# Altium PCB PCB1.PcbDoc
Units mm, origin at the board's own origin, x right, y up, seen from the top; angles counter-clockwise.
Board outline 54.36 x 32.89 mm, 2 copper layers (Top Layer, Bottom Layer); 7 components, 6 nets, 16 pads, 0 vias.
Unrouted connection lines stored in the file: 2.
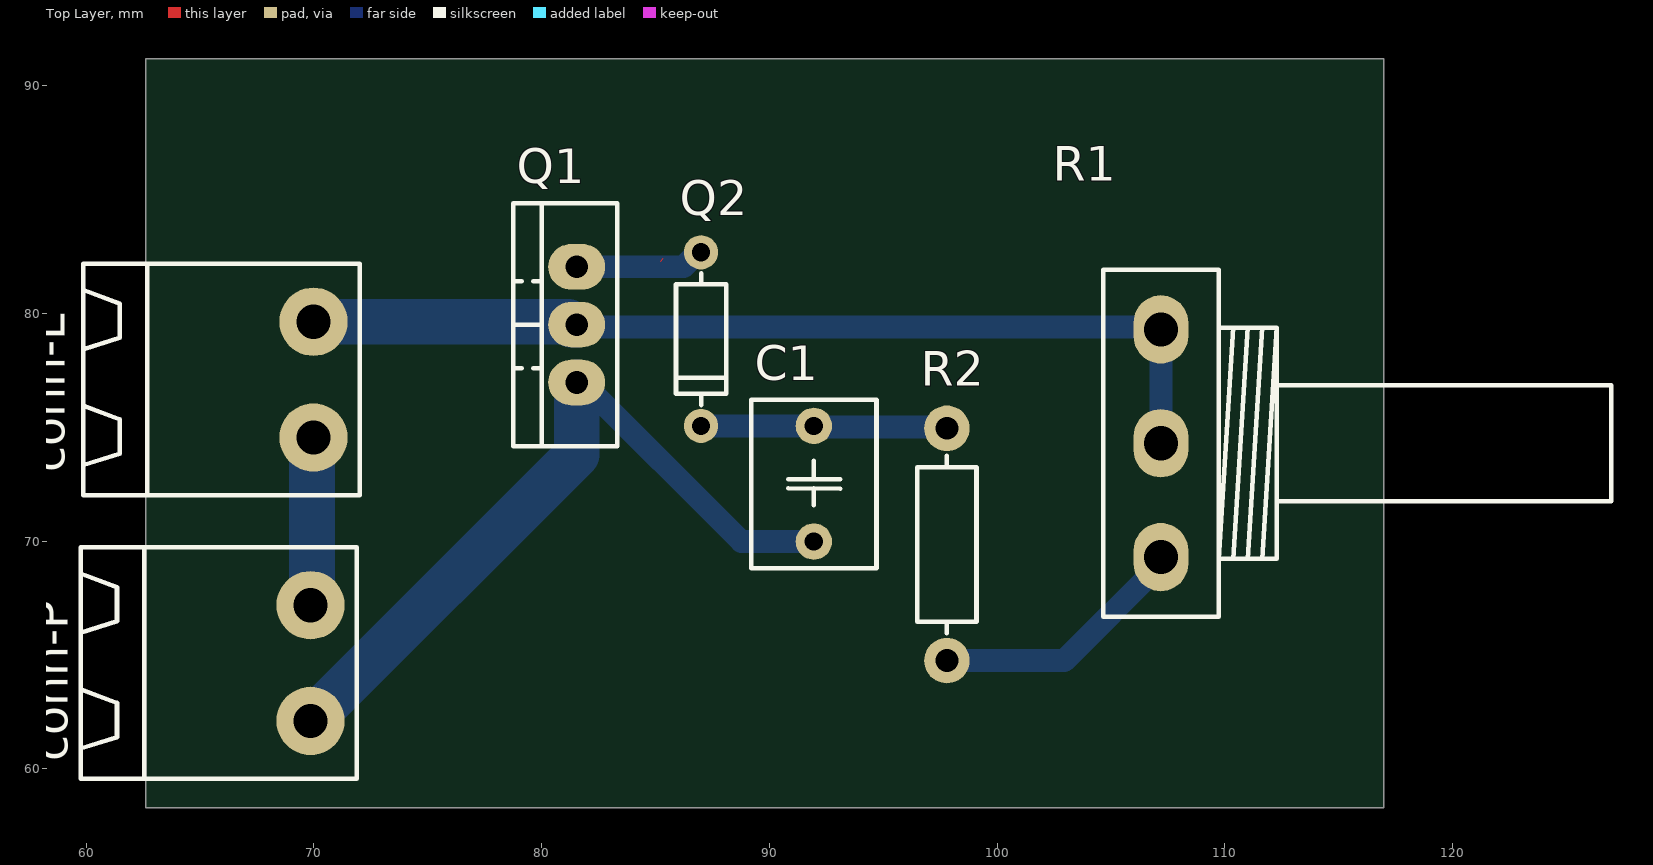
[diagram p0: Top Layer view]
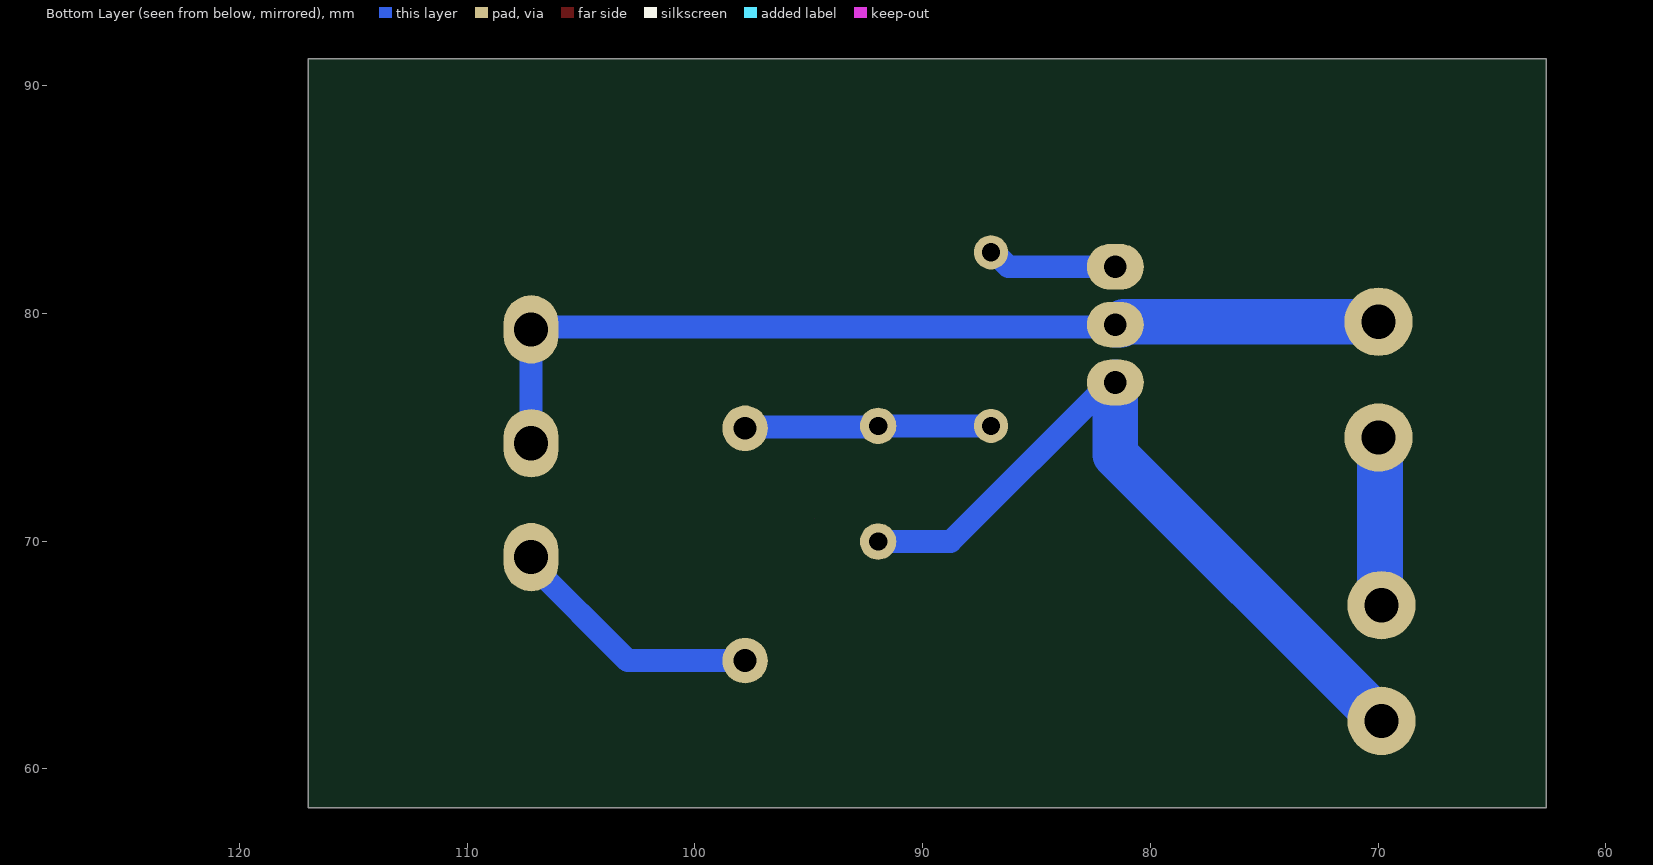
[diagram p1: Bottom Layer view, seen from below]
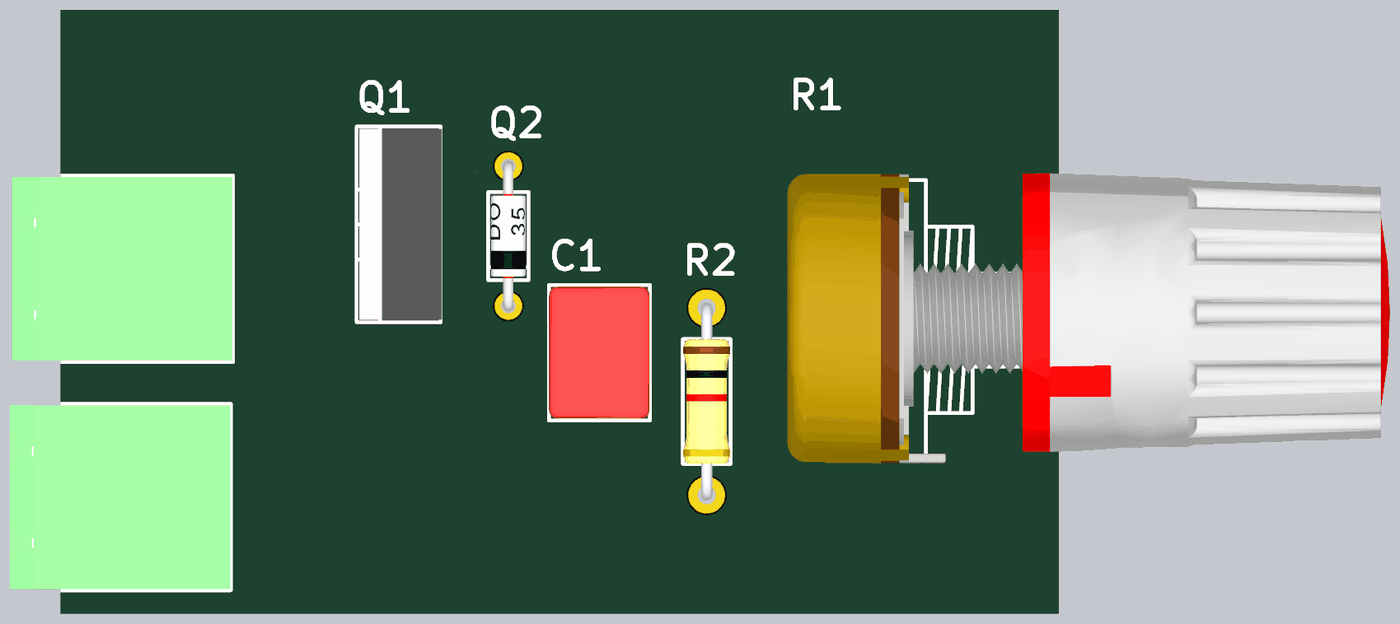
[diagram p2: 3D render of the assembled board from above, using the file's embedded part models]

## Layer stack, top to bottom
Top Solder: solder mask 0.0102, Solder Resist, Dk 3.5
Top Layer: signal copper 0.0356
Dielectric 1: dielectric 0.32, FR-4, Dk 4.8
Bottom Layer: signal copper 0.0356
Bottom Solder: solder mask 0.0102, Solder Resist, Dk 3.5

## Board outline
62.611,58.293 116.967,58.293 116.967,91.186 62.611,91.186

## Design rules (kind name [scope] priority, off if disabled: settings)
Clearance [All] p1: gap=0.254 ignorepadtopadclearanceinfootprint=FALSE
PolygonConnect [All] p1: connectstyle=Relief reliefconductorwidth=0.254 reliefentries=4 polygonreliefangle="90 Angle" airgapwidth=0.254
RoutingVias [All] p1: holewidth=0.711 width=1.27 viastyle="Through Hole" minholewidth=0.711 minwidth=1.27 maxholewidth=0.711 maxwidth=1.27
SolderMaskExpansion [All] p1: expansion=0.102 istentingtop=FALSE
Width [All] p1: maxlimit=2 minlimit=0.5 preferedwidth=1
30 further rules are at their usual default settings.

## Components (designator, comment, footprint, x,y, rotation, side; value= is the part's Value field where it differs from the comment)
C1 "68nF" C_FLM_7X5H11 91.948,72.517 r270 top
conn-L "CONN_TB2" MSTB_2 69.977,77.089 r90 top
conn-P "CONN_TB2" MSTB_2 69.85,64.643 r90 top
Q1 "BTA12" TO220_3 81.534,79.502 r90 top
Q2 "DB3" D_AX03_DO35 86.995,78.867 r270 top
R1 "POT10K" VOL_R 107.188,74.295 r270 top
R2 "3.3K" R025W_AX04 97.79,69.85 r270 top

## Footprints (in the part's own frame and the unit in brackets; to place one, negate y for a bottom-side part, rotate by r counter-clockwise, add the part's x,y. Pads: shape width x height; smd on the part's side, far side on the other; paste and mask are expansions set on the pad)
C_FLM_7X5H11 [mm] "Capacitor, THT, Metallized Polyester Film with 7.2x5.5x11.5mm LxTxH"
  round 1.6 hole 0.8: 1(-2.54,0) 2(2.54,0)
  silkscreen extent -3.68,-2.75 3.7,2.75, body extent -3.6,-2.75 3.6,2.75, height 11.5
D_AX03_DO35 [mm] "DIODE 0.3 INCH SPACING DO35"
  round 1.5 hole 0.8: 1(-3.81,0) 2(3.81,0)
  silkscreen extent -2.89,-1.1 2.89,1.1, body extent -4.09,-0.96 4.09,0.96, height 1.96
MSTB_2 [mm] "PHOENIX MSTB 2, 5-G, 5.08mm pitch, 2pin"
  round 3 hole 1.5: 1(-2.54,0) 2(2.54,0)
  silkscreen extent -5.08,-2.03 5.08,10.1, body extent -5,-2 5,10, height 8.7
R025W_AX04 [mm] "RESISTOR 1/4 WATT, AXIAL0.4"
  round 2 hole 1: 1(-5.1,0) 2(5.1,0)
  silkscreen extent -3.9,-1.3 3.9,1.3, body extent -5.38,-1.28 5.38,1.28, height 2.6
TO220_3 [mm] "TO-220 3 LEAD, TO-262, pitch: 2.54mm  10x4.5mm"
  oval 2x2.5 hole 1: 1(-2.54,0) 2(0,0) 3(2.54,0)
  silkscreen extent -5.33,-1.78 5.33,2.79, body extent -5.2,-1.85 5.2,2.65, height 19
VOL_R [mm] "VOULME RIGHT ANGLE"
  oval 3x2.4 hole 1.5: 1(-5,0) 2(0,0) 3(5,0)
  silkscreen extent -7.62,-2.54 7.62,19.78, body extent -10.76,-5 10.93,27.8, height 24.54

## Part data
C1: library part CAP_THD_FLM, "CAP, THD, FILM,", ASSEMBLY=ASSEMBLY, DESC=DESCRIPTION, DIST#=MOUSER, MANF=MANF, MANF_P#=MANF_PART#, PARAM=20%, PARAM2=25V, PRICE="10= 5$"
conn-L conn-P: library part CONN_MSTB_2, "CONN, PHOENIX MSTB, 5-G, 5.08mm pitch", PARAM=12A, PARAM2=320V
Q1: library part TRIAC_BTA12-600_TO220, "Triac, 600V, 12A, TO-220", MANF=ST, MANF_P#="BTA12-600BW, BTA12-600CW, BTA12-600TW", PRICE=1200toman@PAYA
Q2: library part DIAC_DB3_DO35, "Diac, 32VBO, DO-35", MANF=ST, MANF_P#=DB3, PARAM="2A, -40~125oC", PARAM2=32VBO, PRICE=toman@PAYA
R1: library part RES_THD_POT_VOL, "RESISTOR, THD, Potentiometer Volume"
R2: library part RES_THD, "RESISTOR, THD", ASSEMBLY=ASSEMBLY, DESC=DESCRIPTION, DIST#=MOUSER, MANF="KOA SPEER", MANF_P#=RK73H1ETTP4701F, PARAM=0.063W, PARAM2=1%, PRICE="100= 0.5$"

## Nets (pads, with @x,y where several pads share a name; then routed paths per layer and width w, separated by ;. In a path a pad name is that pad's centre, name@x,y a point inside that pad or via, vN(x,y) a via of type N, cw(c..) or ccw(c..) an arc to the next point about the centre after c; other vN are vias at no path point)
FAZ: C1.2 conn-P.1 Q1.1 | length 33
  Bottom Layer w1: Q1.1 81.784,76.962 88.769,69.977 C1.2
  Bottom Layer w2: conn-P.1 81.534,73.787 Q1.1
NetC1_1: C1.1 Q2.2 R2.1 | length 10.9
  Top Layer w0.025: 94.732,71.003 94.742,70.993
  Bottom Layer w1: Q2.2 C1.1 92.002,75.003 97.736,75.003 R2.1
Netconn-L_2: conn-L.2 Q1.2 R1.1 R1.2 | length 42.3
  Bottom Layer w1: Q1.2 81.637,79.399 107.085,79.399 R1.1 R1.2
  Bottom Layer w2: conn-L.2 81.157,79.629 81.284,79.502 Q1.2
NetQ1_3: Q1.3 Q2.1 | length 5.9
  Top Layer w0.025: 85.217,82.296 85.344,82.423
  Bottom Layer w1: Q1.3 86.225,82.042 86.86,82.677 Q2.1
NetR1_3: R1.3 R2.2 | length 11.5
  Bottom Layer w1: R2.2 102.943,64.75 107.188,68.995 R1.3
NULL: conn-L.1 conn-P.2 | length 7.4
  Bottom Layer w2: conn-P.2 69.913,67.246 69.913,74.486 conn-L.1